# Altium PCB PCB3_fresa_v1.1A.PcbDoc
Units mil, origin at the board's own origin, x right, y up, seen from the top; angles counter-clockwise.
Board outline 7100 x 5100 mil, 2 copper layers (Top Layer, Bottom Layer); 89 components, 63 nets, 247 pads, 16 vias.
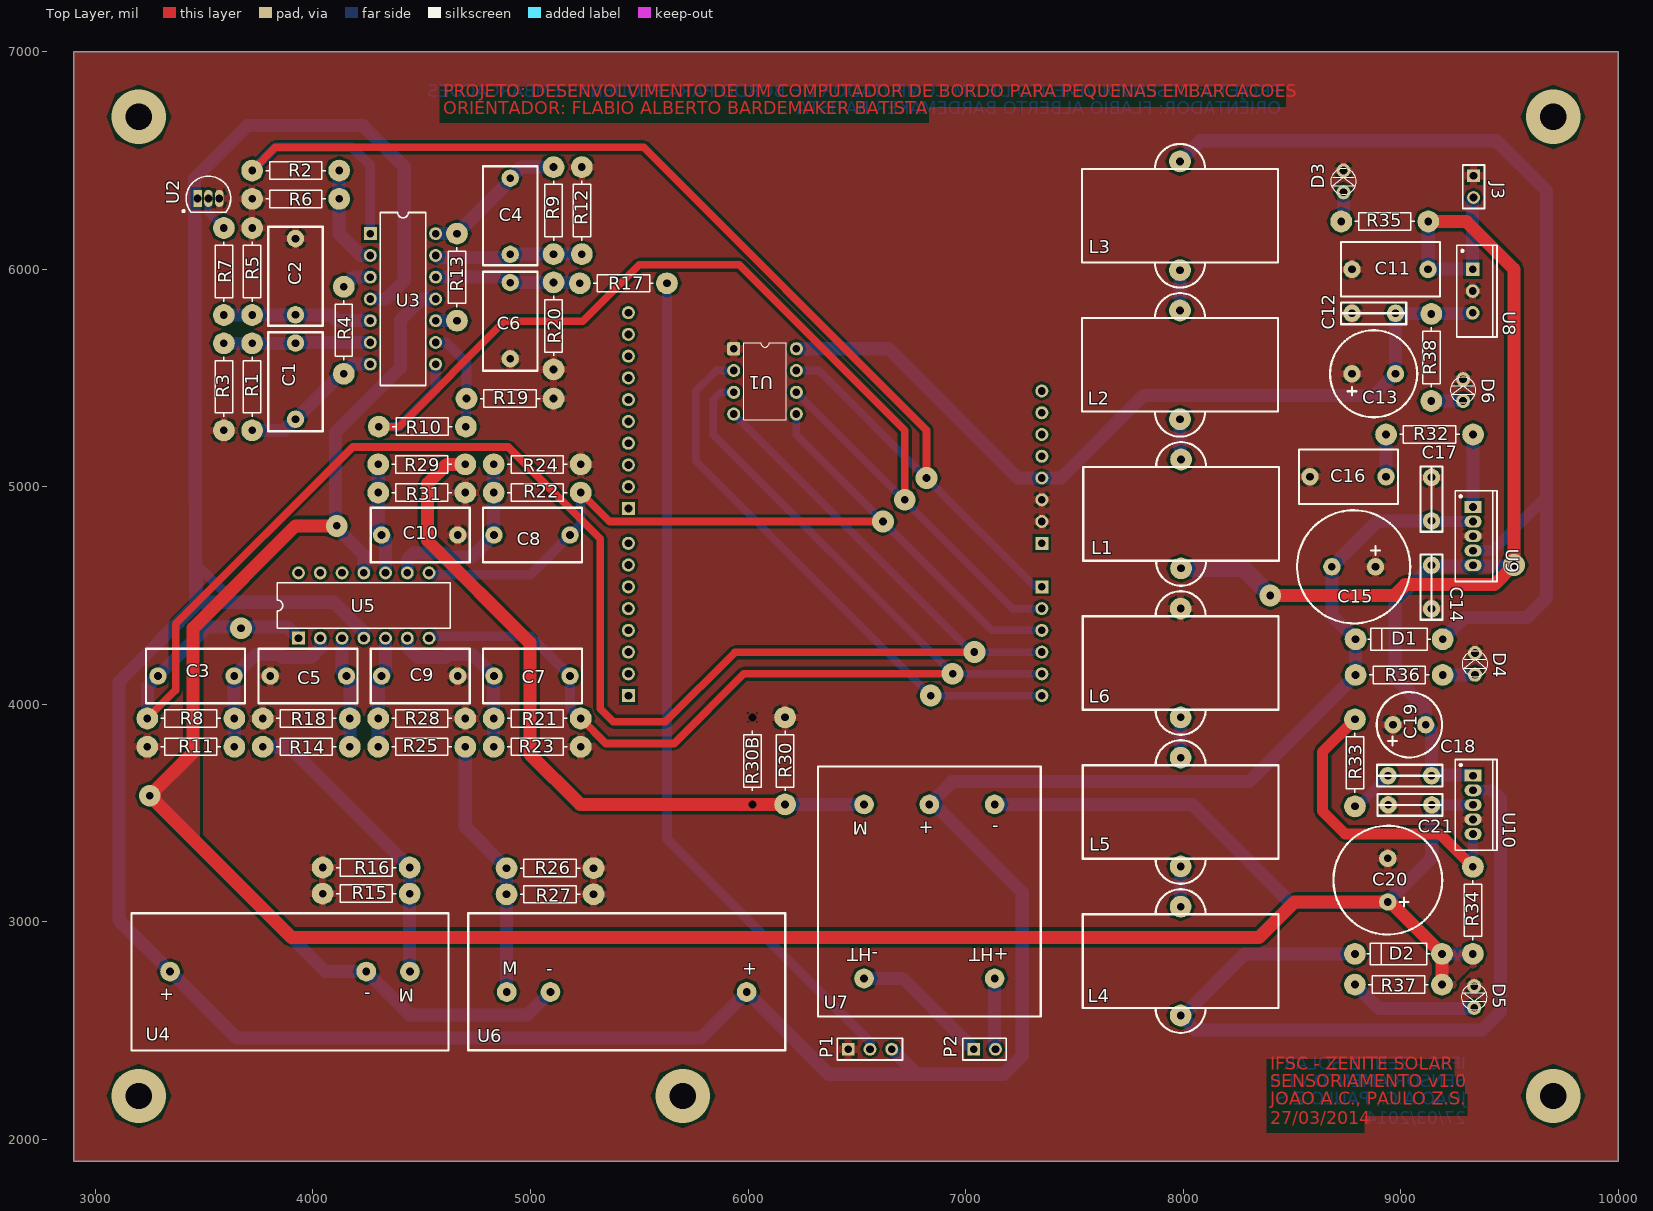
[diagram p0: Top Layer view]
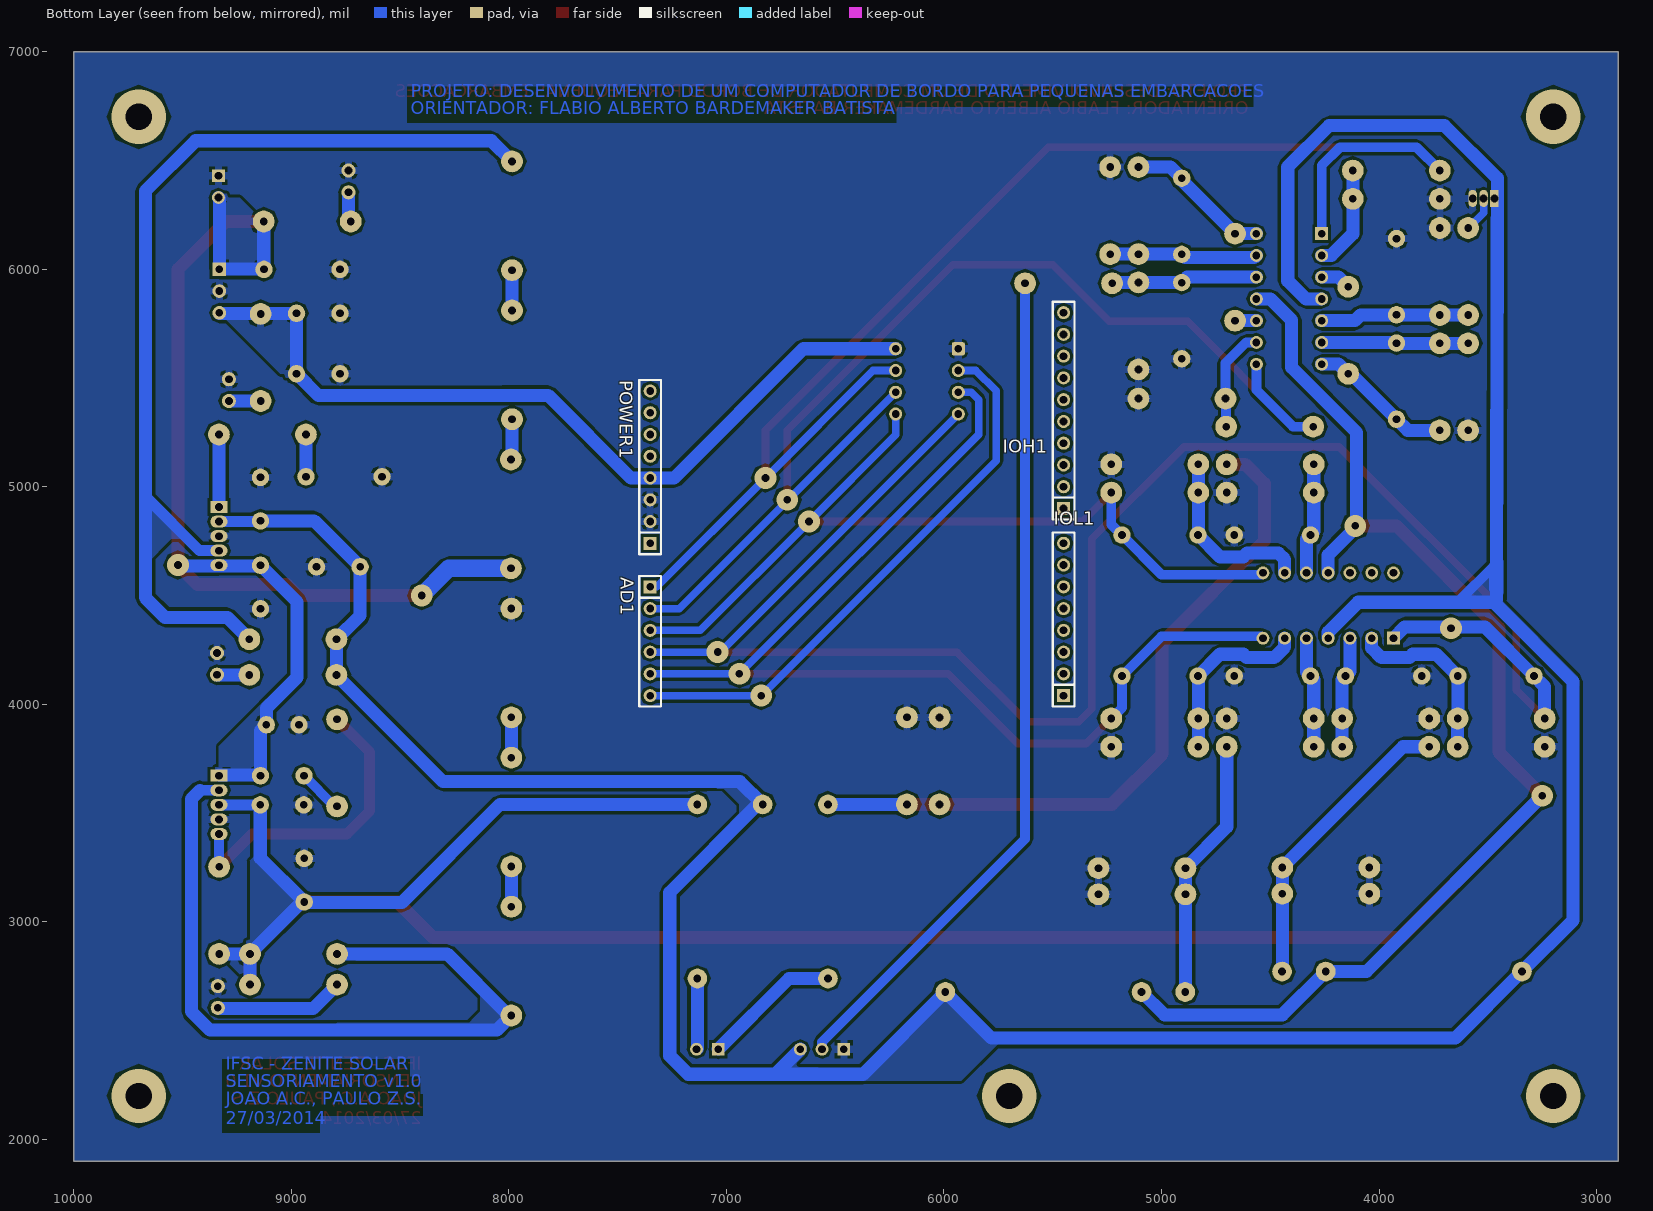
[diagram p1: Bottom Layer view, seen from below]

## Layer stack, top to bottom
Top Layer: signal copper 1.4
Dielectric: dielectric 12.6, FR-4, Dk 4.8
Bottom Layer: signal copper 1.4

## Board outline
2900,7000 10000,7000 10000,1900 2900,1900

## Design rules (kind name [scope] priority, off if disabled: settings)
Clearance [All] p1: gap=12
ComponentClearance [All] p1: gap=10 collisioncheckmode=3 verticalgap=30 showdistances=FALSE
HoleSize [All] p1: absolutevalues=TRUE maxlimit=250 minlimit=31.5 maxpercent=80.000 minpercent=20.000
HoleToHoleClearance [All] p1: gap=8 allowstackedmicrovias=TRUE
PlaneClearance [All] p1: clearance=30
PlaneConnect [All] p1: planeconnectstyle=Relief reliefexpansion=20 reliefentries=4 reliefconductorwidth=35 reliefairgap=8
PolygonConnect [All] p1: connectstyle=Relief reliefconductorwidth=35 reliefentries=4 polygonreliefangle="90 Angle"
RoomDefinition supplies [InComponentClass('supplies')] p1: confinementstyle=ConfineIn formatcopy=TRUE lockcomponents=FALSE outline 9456.93,2475 9456.93,6590 7519.93,6590 7519.93,2475
RoutingLayers [All] p1: top layer_v5=FALSE bottom layer_v5=TRUE
RoutingVias [All] p1: holewidth=35.43 width=60 viastyle="Through Hole" minholewidth=31.5 minwidth=60 maxholewidth=250 maxwidth=250
SilkscreenOverComponentPads [All] p1: minsilkscreentomaskgap=10
SolderMaskExpansion [All] p1: expansion=4
SupplyNets 3V3 [InNet('3V3')] p1: voltage=3.000
SupplyNets 5V_1 [InNet('5V')] p2: voltage=5.000
SupplyNets -15V_1 [InNet('-15V')] p3: voltage=-15.00
SupplyNets +15V_1 [InNet('+15V')] p4: voltage=15.00
SupplyNets +12V_1 [InNet('+12V')] p5: voltage=12.00
Width 5V [InNet('5V')] p1: maxlimit=60 minlimit=35 preferedwidth=45
Width -15V [InNet('-15V')] p2: maxlimit=80 minlimit=45 preferedwidth=60
Width +15V [InNet('+15V')] p3: maxlimit=80 minlimit=45 preferedwidth=60
Width +12V [InNet('+12V')] p4: maxlimit=100 minlimit=60 preferedwidth=80
Width [All] p5: maxlimit=60 minlimit=35 preferedwidth=45
21 further rules are at their usual default settings.

## Classes and differential pairs
component class arduinoshield: AD1 IOH1 IOL1 POWER1 U1
component class sensor: C1 C2 C3 C4 C5 C6 C7 C8 C9 C10 P1 P2 R1 R2 R3 R4 R5 R6 R7 R8 R9 R10 R11 R12 R13 R14 R15 R16 R17 R18 R19 R20 R21 R22 R23 R24 R25 R26 R27 R28 R29 R30 R30B R31 U2 U3 U4 U5 U6 U7
component class supplies: C11 C12 C13 C14 C15 C16 C17 C18 C19 C20 C21 D1 D2 D3 D4 D5 D6 J3 L1 L2 L3 L4 L5 L6 R32 R33 R34 R35 R36 R37 R38 U8 U9 U10

## Components (designator, comment, footprint, x,y, rotation, side; value= is the part's Value field where it differs from the comment)
AD1 "AD" "Header 6x1 8.5mm" 7350,4540 r270 bottom locked
C1 "approved sub OK" cap33n63v 3920,5660 r270 top locked
C2 "approved sub OK" cap33n63v 3920,5790 r90 top locked
C3 "approved sub OK" cap33n63v 3638,4130 r180 top locked
C4 "approved sub OK" cap33n63v 4907,6068 r90 top locked
C5 "approved sub OK" cap33n63v 4154.33,4130 r180 top locked
C6 "approved sub OK" cap33n63v 4907,5938 r270 top locked
C7 "approved sub OK" cap33n63v 4832,4130 r0 top locked
C8 "approved sub OK" cap33n63v 4832,4778 r0 top locked
C9 "approved sub OK" cap33n63v 4315.67,4130 r0 top locked
C10 "approved sub OK" cap33n63v 4315.67,4778 r0 top locked
C11 "approved sub OK" cap33n63v 8774.93,5999 r0 top locked
C12 "approved sub OK" cap100n 8774.93,5797 r0 top locked
C13 "approved sub OK" cap1000u25v 8774.93,5519 r0 top locked
C14 "approved sub OK" cap100n 9140.93,4439 r90 top locked
C15 "approved sub OK" cap2200u25v 8882.93,4632 r180 top locked
C16 "approved sub OK" cap33n63v 8581.93,5046 r0 top locked
C17 "approved sub OK" cap100n 9140.93,5043 r270 top locked
C18 "approved sub OK" cap100n 8940.93,3672 r0 top locked
C19 "approved sub OK" cap100u35v 8963.93,3906 r0 top locked
C20 "approved sub OK" cap470u50v 8939.93,3092 r90 top locked
C21 "approved sub OK" cap100n 9141.93,3538 r180 top locked
D1 "MUR160" DO-41 8991.93,4299 r90 top locked
D2 "MUR160" DO-41 8988.93,2853 r90 top locked
D3 "LED" LED-3MM-BLUE 8735.93,6353 r90 top locked
D4 "LED" LED-3MM-BLUE 9340.93,4136 r90 top locked
D5 "LED" LED-3MM-BLUE 9336.93,2705 r270 top locked
D6 "LED" LED-3MM-BLUE 9285.93,5394 r90 top locked
IOH1 "IOH" "Header 10x1 8.5mm" 5450,4900 r90 bottom locked
IOL1 "IOL" "Header 8x1 8.5mm" 5450,4040 r90 bottom locked
J3 "Header 2" HDR1X2 9333.93,6429 r270 top locked
L1 "INDC_180u_Toroid" Inductor 7989.93,4875 r180 top locked
L2 "INDC_180u_Toroid" Inductor 7984.93,5560 r180 top locked
L3 "INDC_180u_Toroid" Inductor 7984.93,6245 r180 top locked
L4 "INDC_180u_Toroid" Inductor 7987.93,2820 r180 top locked
L5 "INDC_180u_Toroid" Inductor 7987.93,3505 r180 top locked
L6 "INDC_180u_Toroid" Inductor 7987.93,4190 r180 top locked
P1 "Header 3" HDR1X3 6460,2415 r0 top locked
P2 "Header 2" HDR1X2 7037,2415 r0 top locked
POWER1 "POWER_UNO" "Header 8x1 8.5mm" 7350,4740 r90 bottom locked
R1 "Carbon Film" RESTH_AXIAL-0.4#1 3721,5459 r270 top locked
R2 "Carbon Film" RESTH_AXIAL-0.4#1 3921,6453 r0 top locked
R3 "Carbon Film" RESTH_AXIAL-0.4#1 3591,5459 r90 top locked
R4 "Carbon Film" RESTH_AXIAL-0.4#1 4142,5719 r270 top locked
R5 "Carbon Film" RESTH_AXIAL-0.4#1 3591,5989 r270 top locked
R6 "Carbon Film" RESTH_AXIAL-0.4#1 3921,6323 r180 top locked
R7 "Carbon Film" RESTH_AXIAL-0.4#1 3721,5989 r90 top locked
R8 "Carbon Film" RESTH_AXIAL-0.4#1 3439,3935 r180 top locked
R9 "Carbon Film" RESTH_AXIAL-0.4#1 5106,6269 r90 top locked
R10 "Carbon Film" RESTH_AXIAL-0.4#1 4503,5276 r0 top locked
R11 "Carbon Film" RESTH_AXIAL-0.4#1 3439,3805 r0 top locked
R12 "Carbon Film" RESTH_AXIAL-0.4#1 5236,6269 r270 top locked
R13 "Carbon Film" RESTH_AXIAL-0.4#1 4662,5963 r90 top locked
R14 "Carbon Film" RESTH_AXIAL-0.4#1 3969.67,3805 r0 top locked
R15 "Carbon Film" RESTH_AXIAL-0.4#1 4245,3130 r180 top locked
R16 "Carbon Film" RESTH_AXIAL-0.4#1 4245,3250 r180 top locked
R17 "Carbon Film" RESTH_AXIAL-0.4#1 5427,5935 r180 top locked
R18 "Carbon Film" RESTH_AXIAL-0.4#1 3969.67,3935 r180 top locked
R19 "Carbon Film" RESTH_AXIAL-0.4#1 4906,5405 r0 top locked
R20 "Carbon Film" RESTH_AXIAL-0.4#1 5106,5739 r270 top locked
R21 "Carbon Film" RESTH_AXIAL-0.4#1 5031,3935 r0 top locked
R22 "Carbon Film" RESTH_AXIAL-0.4#1 5031,4973 r0 top locked
R23 "Carbon Film" RESTH_AXIAL-0.4#1 5031,3805 r180 top locked
R24 "Carbon Film" RESTH_AXIAL-0.4#1 5031,5103 r180 top locked
R25 "Carbon Film" RESTH_AXIAL-0.4#1 4500.33,3805 r180 top locked
R26 "Carbon Film" RESTH_AXIAL-0.4#1 5090,3247 r0 top locked
R27 "Carbon Film" RESTH_AXIAL-0.4#1 5090,3127 r0 top locked
R28 "Carbon Film" RESTH_AXIAL-0.4#1 4500.33,3935 r0 top locked
R29 "Carbon Film" RESTH_AXIAL-0.4#1 4500.33,5103 r180 top locked
R30 "Carbon Film" RESTH_AXIAL-0.4#1 6170,3740 r90 top locked
R30B "Carbon Film" RESTH_AXIAL-0.4#2 6020,3740 r90 top
R31 "Carbon Film" RESTH_AXIAL-0.4#1 4500.33,4973 r0 top locked
R32 "Carbon Film" RESTH_AXIAL-0.4#1 9131.93,5240 r180 top locked
R33 "Carbon Film" RESTH_AXIAL-0.4#1 8788.93,3731 r90 top locked
R34 "Carbon Film" RESTH_AXIAL-0.4#1 9330.93,3053 r90 top locked
R35 "Carbon Film" RESTH_AXIAL-0.4#1 8925.93,6219 r0 top locked
R36 "Carbon Film" RESTH_AXIAL-0.4#1 8991.93,4135 r180 top locked
R37 "Carbon Film" RESTH_AXIAL-0.4#1 8988.93,2712 r0 top locked
R38 "Carbon Film" RESTH_AXIAL-0.4#1 9139.93,5594 r90 top locked
U1 "TL7726" DIP8-300 6078,5484 r0 top locked
U2 "LM35" Z03A 3520,6325 r270 top locked
U3 "LM324AJ" J014 4414,5863 r270 top locked
U4 "LA150-P" LA150-P 4446,2772 r180 top locked
U5 "LM324AJ" J014 4234,4454 r0 top locked
U6 "LA150-P" LA150-P 4891,2678 r0 top locked
U7 "LV20-P" LV20-P 7133,2740 r180 top locked
U8 "LM7805" T03B 9329.96,5899 r270 top locked
U9 "LM2577" T05A 9331.93,4773 r270 top locked
U10 "LM2575-15" T05A 9331.93,3538 r270 top locked

## Footprints (in the part's own frame and the unit in brackets; to place one, negate y for a bottom-side part, rotate by r counter-clockwise, add the part's x,y. Pads: shape width x height; smd on the part's side, far side on the other; paste and mask are expansions set on the pad)
cap33n63v [mil]
  round 80 hole 35.43: 1(0,0) 2(350,0)
  silkscreen extent -50,-125 405,125
cap100n [mil]
  round 80 hole 35.43: 1(0,0) 2(200,0)
  silkscreen extent -50,-50 250,50
cap100u35v [mil]
  round 80 hole 35.43: 1(0,0) 2(150,0)
  silkscreen extent -75,-150 225,150
cap470u50v [mil]
  round 80 hole 35.43: 1(0,0) 2(200,0)
  silkscreen extent -150,-250 350,250
cap1000u25v [mil]
  round 80 hole 35.43: 1(0,0) 2(200,0)
  silkscreen extent -100,-200 300,200
cap2200u25v [mil]
  round 80 hole 35.43: 1(0,0) 2(200,0)
  silkscreen extent -160,-260 360,260
DIP8-300 [mil] "DIP, 8-Leads, 0.300\" lead span , 0.100\" lead pitch, IPC Density A"
  round 39.37 on Mech14: 0(0,0)
  rrect25% 60x60 hole 35.43: 1(-144,150)
  round 60 hole 35.43: 2(-144,50) 3(-144,-50) 4(-144,-150) 5(144,-150) 6(144,-50) 7(144,50) 8(144,150)
  silkscreen extent -98,-177 98,177, body extent -98,-177 98,177, height 210
DO-41 [mm] "Diode, thru-hole"
  round 2.54 hole 0.9: A(0,-5.08) K(0,5.08)
  silkscreen extent -1.27,-3.68 1.27,3.68
HDR1X2 [mm] "Connector; Header; 2 Position"
  rect 1.5x1.5 hole 0.9: 1(0,0)
  round 1.5 hole 0.9: 2(2.54,0)
  silkscreen extent -1.27,-1.27 3.81,1.27
HDR1X3 [mm] "Connector; Header; 3 Position"
  rect 1.5x1.5 hole 0.9: 1(0,0)
  round 1.5 hole 0.9: 2(2.54,0) 3(5.08,0)
  silkscreen extent -1.27,-1.27 6.35,1.27
"Header 6x1 8.5mm" [mil] "Stackable 6 pin header"
  rect 60x60 hole 35.43: 1(0,0)
  round 60 hole 35.43: 2(100,0) 3(200,0) 4(300,0) 5(400,0) 6(500,0)
  silkscreen extent -50,-50 550,50
"Header 8x1 8.5mm" [mil] "Stackable 8 pin header"
  rect 60x60 hole 35.43: 1(0,0)
  round 60 hole 35.43: 2(100,0) 3(200,0) 4(300,0) 5(400,0) 6(500,0) 7(600,0) 8(700,0)
  silkscreen extent -50,-50 750,50
"Header 10x1 8.5mm" [mil] "Stackable 10 pin header"
  rect 60x60 hole 35.43: 1(0,0)
  round 60 hole 35.43: 2(100,0) 3(200,0) 4(300,0) 5(400,0) 6(500,0) 7(600,0) 8(700,0) 9(800,0) 10(900,0)
  silkscreen extent -50,-50 950,50
Inductor [mm] "Toroidal Inductor"
  round 2.54 hole 0.9: 1(0,6.35) 2(0,-6.35)
  silkscreen extent -11.43,-8.38 11.43,8.38
J014 [mm] "DIP; 14 Leads; Row Spacing 7.62 mm; Pitch 2.54 mm"
  rect 1.5x1.5 hole 0.9: 1(-7.62,-3.81)
  round 1.5 hole 0.9: 2(-5.08,-3.81) 3(-2.54,-3.81) 4(0,-3.81) 5(2.54,-3.81) 6(5.08,-3.81) 7(7.62,-3.81) 8(7.62,3.81) 9(5.08,3.81) 10(2.54,3.81) 11(0,3.81) 12(-2.54,3.81) 13(-5.08,3.81) 14(-7.62,3.81)
  silkscreen extent -10.1,-2.65 10.1,2.65
LA150-P [mm] "Current Transducer"
  round 2.3 hole 0.9: 1(0,0) 2(5.1,0) 3(28,0)
  silkscreen extent -4.5,-6.8 32.5,9.2
LED-3MM-BLUE [mil]
  round 65 hole 35.43: A(0,0) K(100,0)
  silkscreen extent -9,-59 109,59, body extent -15,-63 114,67, height 250
LV20-P [mm] "Voltage Transducer LV 20-P"
  round 2.3 hole 0.9: 1(0,-20.32) 2(7.62,-20.32) 3(15.24,-20.32) 4(0,0) 5(15.24,0)
  silkscreen extent -5.38,-24.76 20.62,4.44
RESTH_AXIAL-0.4#1 [mm]
  round 2.54 hole 0.9: 1(-5.08,0) 2(5.08,0)
  silkscreen extent -3.5,-1.02 3.5,1.02
RESTH_AXIAL-0.4#2 [mm]
  round 0 / inner round 0 / far side round 2.54 hole 0.914: 1(-5.08,0) 2(5.08,0)
  silkscreen extent -3.5,-1.02 3.5,1.02, body extent -5.38,-1.28 5.38,1.28, height 2.6
T03B [mm] "TO, Thru-Hole, Vertical, Heatsink Mounted; 3 In-Line Leads; Pitch 2.54 mm"
  rect 1.6x1.6 hole 0.9: 1(-2.54,0)
  round 1.6 hole 0.9: 2(0,0) 3(2.54,0)
  silkscreen extent -5.35,-1.85 5.35,2.85, body extent -5.35,-1.85 5.35,2.85, height 19.4
T05A [mm] "TO, Thru-Hole, Vertical, Heatsink Mounted; 5 In-Line Leads; Pitch 1.70 mm"
  rect 1.4x2 hole 0.9: 1(-3.4,0)
  oval 1.4x2 hole 0.9: 2(-1.7,0) 3(0,0) 4(1.7,0) 5(3.4,0)
  silkscreen extent -5.3,-2.1 5.3,2.8, body extent -5.3,-2.1 5.3,2.8, height 15.9
Z03A [mm] "TO, Flat Index; 3 In-Line, Axial Leads; Body Dia. 5mm; Leads 0.55 x 0.50 mm (max)"
  rect 2x1 hole 0.9: 1(0,-1.27)
  oval 2x1 hole 0.9: 2(0,0) 3(0,1.27)
  silkscreen extent -2.6,-3.02 1.6,2.6, body extent -2.61,-2.61 1.6,2.61, height 5.2

## Part data
C1 C2 C3 C4 C5 C6 C7 C8 C9 C10 C11 C12 C13 C14 C15 C16 C17 C18 C19 C20 C21: library part CAPC_330n_0805, "Capacitor SMD Cer 330nF 10% 25V X7R 0805"
D1 D2: library part DIODE_1N4007_1000V_1.0A_DO-41, "Diode 1N4007 1A 1000V THD"
D3 D4 D5 D6: library part LED-BLUE-3MM, "LED-BLUE-3MM"
J3 P2: "Header, 2-Pin"
L1 L2 L3 L4 L5 L6: "Power Inductor 180µH 10% SMD Toroid"
P1: "Header, 3-Pin"
R1 R2 R3 R4 R5 R6 R7 R8 R9 R10 R11 R12 R13 R14 R15 R16 R17 R18 R19 R20 R21 R22 R23 R24 R25 R26 R27 R28 R29 R30 R30B R31 R32 R33 R34 R35 R36 R37 R38: library part RES_1K_Axial_0.25W_5%, "Resistor THD Axial 1k Ohm 0.25W 5% Carbon Film"
U1: "Hex Clamping Circuit - Overvoltage Limiter"
U2: library part LM35CAZ, "Precision Centigrade Temperature Sensor, 3-pin TO-92"
U3 U5: "Quadruple Operational Amplifier"
U4 U6: "Current Transducer"
U7: "Voltage Transducer"
U8: library part LM78M05CT, "3-Terminal Positive Voltage Regulators, 3-pin TO-220"
U9: "Boost"
U10: library part LM2575, "Buck"

## Via types
v1: diameter 100, hole 35.43, Top Layer to Bottom Layer, 11 vias
v2: diameter 250, hole 120, Top Layer to Bottom Layer, 5 vias

## Nets (pads, with @x,y where several pads share a name; then routed paths per layer and width w, separated by ;. In a path a pad name is that pad's centre, name@x,y a point inside that pad or via, vN(x,y) a via of type N, cw(c..) or ccw(c..) an arc to the next point about the centre after c; other vN are vias at no path point)
3V3: POWER1.5
5V: C12.2 C13.2 POWER1.4 R38.2 U1.8 U8.3 | length 3829.2
  Bottom Layer w60: U1.8 6646,5634 7240,5040 POWER1.4 7439,5040 7819,5420 8030.49,5420 8031.49,5419 8874.93,5419 C13.2 C12.2 U8.3@9327.96,5797
+12V: C11.2 C14.2 C18.2 C19.2 J3.2 L1.1 R35.2 U8.1 U9.5 U10.1 | length 5917.3
  Top Layer w60: v1(8400,4500) 8970,4500 9020,4550 9430,4550 v1(9520,4640) 9520,6000 9301,6219 R35.2 ; C14.2 C14.2@9141.07,4639.14
  Bottom Layer w60: R35.2 9125.93,6000 9328.96,6000 U8.1 9329.96,6325.03 J3.2 ; C18.2 C18.2@9140.93,3675 ; C14.2@9140.93,4636 U9.5@9331.93,4636 ; C14.2 8972,4470.07 8972,4124 9113.93,3982.07 C19.2 9140.93,3879 C18.2@9140.93,3675 ; U10.1@9331.93,3675 C18.2@9140.93,3675 ; U9.5@9331.93,4636.14 v1@9519.14,4636.14 ; v1@9519.14,4639.14 v1(9520,4640)
  Bottom Layer w80: L1.1 8275,4625 v1(8400,4500)
+15V: C15.2 C17.2 D1.K P1.3 R36.2 U2.1 U3.4 U4.3 U5.4 U6.3 U7.2 U9.2 | length 16245.4
  Bottom Layer w45: 3469,4639 3470,4638 3639,4469
  Bottom Layer w50: 3470,4530 3470,4638 ; C17.2@9144.93,4839.93 U9.2
  Bottom Layer w60: 3456.5,6234.44 3456.5,6419.5 ; 3457,6233.94 3460,4480 ; 3459.5,6419.5 3700,6660 4230,6660 4420,6470 4420,5946 4337,5863 U3.4 ; U5.4 4234,4331.28 4096.28,4469 3639,4469 3474,4469 3110,4105 3110,3005.64 U4.3 3649.64,2466 5781.36,2466 U6.3 6371.36,2300 6775,2300 ; P1.3 6775,2300 ; C17.2@9144.93,4839 C17.2 8893.93,4843 C15.2 8682.93,4408 D1.K R36.2 8301.93,3645 7176.88,3645 7176.61,3645.28 7089.39,3645.28 7089.12,3645 6938,3645 U7.2 6855,3540 7260,3135 7260,2385 7175,2300 6775,2300
-15V: C20.1 C21.1 D2.A R34.1 R37.2 U3.11 U4.2 U5.11 U6.2 U7.1 U10.3 | length 15421.4
  Top Layer w60: v1(3250,3580) 3901,2929 8349,2929 8512,3092 C20.1 8949.93,3092 D2.A R37.2 ; v1@3251,3581 3450,3780 3450,4350 3920,4820 v1(4110,4820) ; U7.1@7133,3530 U7.1
  Bottom Layer w50: C21.1 U10.3
  Bottom Layer w60: v1(3250,3580) 4058,2772 U4.2 4444.49,2572.72 4986.51,2572.72 U6.2 ; U5.11 4234,4686 4103,4817 4103,5249 4402,5548 4402,5765 4500,5863 U3.11 ; U7.1 8040,3540 8490,3090 8937.93,3090 C20.1 ; C21.1 9141.93,3294 C20.1 ; R37.2 D2.A ; R34.1 D2.A ; C20.1 8949.93,3092 D2.A
AD0: AD1.1 R2.1 U1.7 U3.1 | length 6376.6
  Top Layer w35: R2.1 3828,6560 5520,6560 6820,5260 v1(6820,5040)
  Bottom Layer w35: U1.7 6326,5534 v1(6820,5040) 7320,4540 AD1.1
  Bottom Layer w45: R2.1 3828,6560 4180,6560 4264,6476 U3.1
AD1: AD1.2 R10.1 U1.6 U3.8 | length 5349.3
  Top Layer w35: R10.1 4396,5276 4880,5760 5240,5760 5500,6020 5960,6020 6720,5260 v1(6720,4940)
  Bottom Layer w35: U1.6 7216,4440 AD1.2
  Bottom Layer w45: R10.1 4396,5276 4564,5444 U3.8
AD2: AD1.3 C8.2 R22.2 U1.5 U5.8 | length 3998.5
  Top Layer w35: R22.2@5247,4973 R22.2 5364,4840 v1(6620,4840)
  Bottom Layer w35: U1.5 6222,5238 v1(6620,4840) 7120,4340 AD1.3
  Bottom Layer w45: U5.8 4542.5,4595.5 4999.5,4595.5 C8.2 5231,4827 R22.2
AD3: AD1.4 C3.2 R8.2 U1.4 U5.1 | length 8453.6
  Top Layer w35: R8.2 3370,4066 3370,4370 4182.5,5182.5 4897.5,5182.5 5320,4760 5320,3980 5380,3920 5620,3920 5940,4240 v1(7040,4240)
  Bottom Layer w35: U1.4 7028,4240 v1(7040,4240) AD1.4
  Bottom Layer w60: R8.2 3239,4081 C3.2 3514,4356 3882.47,4356 U5.1@3934,4304.47
  other v1: 3670,4350
AD4: AD1.5 C7.2 R21.2 U1.3 U5.7 | length 5065.3
  Top Layer w35: R21.2 5346,3820 5660,3820 5980,4140 v1(6940,4140)
  Bottom Layer w35: U1.3 5874,5434 5840,5400 5840,5240 v1(6940,4140) AD1.5
  Bottom Layer w45: U5.7 4542.5,4312.5 4999.5,4312.5 C7.2 5182,3984 R21.2
AD5: AD1.6 U1.2 | length 2570.3
  Bottom Layer w35: U1.2 5854,5534 5760,5440 5760,5120 v1(6840,4040) AD1.6
GND: C2.2 C5.2 C6.2 C9.2 C10.2 C11.1 C12.1 C13.1 C14.1 C15.1 C16.1 C17.1 C19.1 C20.2 C21.2 D3.K D4.K D5.A D6.K J3.1 L6.2 P1.1 POWER1.2 POWER1.3 R3.1 R6.2 R7.2 R11.1 R12.1 R15.2 R16.2 R18.2 R19.2 R20.2 R23.1 R24.1 R26.2 R27.2 R28.2 R30.2 R30B.2 R31.2 U1.1 U2.3 U8.2 U9.3 U10.4
IO0: IOL1.1
IO1: IOL1.2
IO2: IOL1.3
IO3: IOL1.4
IO4: IOL1.5
IO5: IOL1.6
IO6: IOL1.7
IO7: IOL1.8
IOREF: POWER1.7
MISO: 
MOSI: 
NetC1_1: C1.1 R1.1 R3.2 U3.6 | length 674.7
  Bottom Layer w60: R3.2 R1.1 3919,5659 C1.1 3923,5663 U3.6
NetC1_2: C1.2 R1.2 R4.2 U3.7 | length 668.9
  Bottom Layer w60: R1.2 3869,5259 C1.2 4129,5519 R4.2 4186,5563 U3.7
NetC2_1: C2.1 R5.2 R7.1 U3.5 | length 684.6
  Bottom Layer w60: R5.2 R7.1 3919,5789 C2.1 4085,5790 4112,5763 U3.5
NetC3_1: C3.1 R8.1 R11.2 U5.2 | length 832.7
  Bottom Layer w60: R11.2 R8.1 3638,3936 C3.1 3738,4230 3845.75,4230 3861.28,4214.47 3989.47,4214.47 4034,4259 U5.2
NetC4_1: C4.1 R9.1 R12.2 U3.13 | length 682.8
  Bottom Layer w60: U3.13 4574,6053 4892,6053 C4.1 4908,6069 R9.1 R12.2
NetC4_2: C4.2 R9.2 R13.2 U3.14 | length 674.6
  Bottom Layer w60: U3.14 R13.2 4907,6408 C4.2 4958,6469 R9.2
NetC5_1: C5.1 R14.2 R18.1 U5.3 | length 513.8
  Bottom Layer w60: U5.3 4134,4150.33 C5.1 4169.67,4114.67 R18.1 R14.2
NetC6_1: C6.1 R17.2 R20.1 U3.12 | length 682.8
  Bottom Layer w60: U3.12 4882,5963 C6.1 5105,5938 R20.1 R17.2@5236,5939
NetC7_1: C7.1 R21.1 R23.2 U5.6 | length 832.4
  Bottom Layer w60: U5.6 4434,4263 4482.53,4214.47 4608.72,4214.47 4624.25,4230 4732,4230 C7.1 4831,4129 R21.1 R23.2
NetC8_1: C8.1 R22.1 R24.2 U5.9 | length 845.6
  Bottom Layer w60: U5.9 4434,4666 4462.62,4694.62 4607.62,4694.62 4624.25,4678 4732,4678 C8.1 4831,4779 R22.1 R24.2
NetC9_1: C9.1 R25.2 R28.1 U5.5 | length 512.9
  Bottom Layer w60: R25.2 R28.1 4300.33,4114.67 C9.1 4334,4148.33 U5.5
NetC10_1: C10.1 R29.2 R31.1 U5.10 | length 512.9
  Bottom Layer w60: R29.2 R31.1 4300.33,4793.33 C10.1 4334,4759.67 U5.10
NetC16_2: C16.2 R32.2 | length 194
  Bottom Layer w60: C16.2 R32.2
NetC18_1: C18.1 R33.1 | length 210.4
  Bottom Layer w45: R33.1 8799.93,3531 C18.1
NetD1_A: D1.A L3.2 U9.4 | length 4687.5
  Bottom Layer w50: U9.4 9421.07,4706.07 9670,4955
  Bottom Layer w60: L3.2 8079.93,6590 9439,6590 9670,6359 9670,4955 9670,4490 9580,4400 9292.93,4400 D1.A
NetD2_K: D2.K L4.1 U10.2 | length 3571.4
  Bottom Layer w50: U10.2 9418.93,3604.93
  Bottom Layer w60: D2.K 8283,2853 8000,2570 L4.1 8054.93,2503 9373,2503 9458,2588 9458,3565.86 9418.93,3604.93
NetD3_A: D3.A R35.1 | length 138.1
  Bottom Layer w60: R35.1 8735.93,6229 D3.A
NetD4_A: D4.A R36.1 | length 149.4
  Bottom Layer w60: R36.1 9339.93,4135 D4.A
NetD5_K: D5.K R37.1 | length 594.8
  Bottom Layer w60: R37.1 8898.93,2602 9333.93,2602 D5.K
NetD6_A: D6.A R38.1 | length 146
  Bottom Layer w60: R38.1 D6.A
NetL1_2: L1.2 L2.1 | length 180
  Bottom Layer w60: L1.2@7984.93,5130 L2.1
NetL2_2: L2.2 L3.1 | length 185
  Bottom Layer w60: L2.2 L3.1
NetL4_2: L4.2 L5.1 | length 185
  Bottom Layer w60: L4.2 L5.1
NetL5_2: L5.2 L6.1 | length 185
  Bottom Layer w60: L5.2 L6.1
NetP1_2: P1.2 R17.1 | length 3906.5
  Bottom Layer w45: R17.1 5627,3381.3 6560,2448.3 P1.2
NetP2_1: P2.1 U7.5 | length 638.6
  Bottom Layer w60: U7.5 6712,2740 P2.1
NetP2_2: P2.2 U7.4 | length 321
  Bottom Layer w60: P2.2@7133,2419 U7.4
NetR2_2: R2.2 R6.1 U3.2 | length 475
  Bottom Layer w60: R2.2 R6.1 4121,6162.09 4220.09,6063 U3.2
NetR4_1: R4.1 U3.3 | length 140.2
  Bottom Layer w60: R4.1 4186,5963 U3.3
NetR5_1: R5.1 U2.2 | length 165.4
  Bottom Layer w35: U2.2 3520,6260 R5.1
NetR10_2: R10.2 R19.1 U3.9 | length 474.6
  Bottom Layer w45: U3.9 4611,5663 4706,5568 R19.1 4703,5402 R10.2
NetR13_1: R13.1 U3.10 | length 98
  Bottom Layer w60: U3.10 R13.1
NetR14_1: R14.1 R15.1 R16.1 U4.1 | length 1382.2
  Bottom Layer w60: R14.1 3890,3805 R16.1 R15.1 U4.1@4445,2773
NetR25_1: R25.1 R26.1 R27.1 U6.1 | length 1206
  Bottom Layer w60: R25.1 4700.33,3436.67 R26.1 R27.1 4890,2679 U6.1
NetR29_1: R29.1 R30.1 R30B.1 U7.3 | length 3279.6
  Top Layer w60: R29.1 4616,5103 4527,5014 4527,4753 4997,4283 4997,3771 5228,3540 R30B.1 R30.1
  Bottom Layer w60: R30.1 U7.3
NetR32_1: R32.1 U9.1 | length 323
  Bottom Layer w60: U9.1@9331.93,4917 R32.1
NetR33_2: R33.2 R34.2 U10.5 | length 1433.6
  Top Layer w50: R33.2 8639,3781.07 8639,3509 8744,3404 9179.93,3404 R34.2
  Bottom Layer w45: R34.2 9330.93,3403.14 U10.5
RESET: POWER1.6
SCK: 
VIN: POWER1.1
pads on no net: IOH1.1 IOH1.2 IOH1.3 IOH1.4 IOH1.5 IOH1.6 IOH1.7 IOH1.8 IOH1.9 IOH1.10 POWER1.8 U1.0 U5.12 U5.13 U5.14
copper on no net:
  other v2: 3200,2200 5700,2200 9700,2200 3200,6700 9700,6700

## Polygon pours and split planes (outlines as drawn)
-15V on Top Layer "Top Layer--15V" (solid, remove dead copper, pour order 23): 9190,2660 9380,2850 9191.93,2850 9188.93,2853
-15V on Top Layer "Bottom Layer-+12V" (solid, remove dead copper, pour order 61): 3480,3810 3480,3350 3250,3580
GND on Top Layer "Top Layer-GND" (solid, remove dead copper, pour order 71): 10000,7000 2900,7000 2900,1900 10000,1900
+15V on Bottom Layer "Bottom Layer-+15V 6" (solid, pour order 59): 3460,4692 3080,4312 3080,4086 3127,4086 3487,4446 3488,4447 3652,4447 3652,4456 3469,4639
+15V on Bottom Layer "Bottom Layer-+15V 5" (solid, pour order 48): 6661,2414 6551,2304 6551,2301 6754,2301 6766,2313
NetD2_K on Bottom Layer "Bottom Layer-NetD2_K 2" (solid, pour order 62): 8007.92,2570.05 8009.95,2570.05 8080,2500 8800,2500 8800,2523 8660,2663 8660,2780 8740,2860 8733,2853 8290.93,2853
NetD2_K on Bottom Layer "Bottom Layer-NetD2_K 1" (solid, pour order 61): 8788.93,2853 8695,2853 8650,2808 8650,2720 8650,2660 8805,2505 8803,2503 8054.93,2503 7987.93,2570 8270.93,2853
+15V on Bottom Layer "Bottom Layer-+15V 3" (solid, pour order 50): 6838,3545 6938,3645 7065,3645 6910,3490 6910,3470
+15V on Bottom Layer "Bottom Layer-+15V 2" (solid, pour order 49): 6840,3540 6980,3400 6980,3550 7070,3640
NetD1_A on Bottom Layer "Bottom Layer-NetD1_A" (solid, remove dead copper, pour order 27): 9670,4950 9480,4760 9550,4760 9670,4640
+12V on Bottom Layer "Bottom Layer-+12V" (solid, remove dead copper, pour order 43): 9333.93,6329 9235.93,6329 9125.93,6219 9125.93,6000 9328.96,6000
5V on Bottom Layer "Bottom Layer-+12V" (solid, remove dead copper, pour order 45): 8974.93,5519 9049.96,5519 9329.96,5799 9327.96,5797 8974.93,5797
+12V on Bottom Layer "Bottom Layer-+12V" (solid, remove dead copper, pour order 47): 9331.93,3675 9331.93,3808.07 9110,4030 9113.93,4026.07 9113.93,3910 9113.93,3897 9140.93,3870 9140.93,3675
-15V on Bottom Layer "Bottom Layer-+12V" (solid, remove dead copper, pour order 49): 9188.93,2853 9178.93,2853 8939.93,3092 9141.93,3294 9141.93,3310 9160,3310 9190,3280 9188.93,3278.93 9188.93,2853
-15V on Bottom Layer "Bottom Layer-+12V" (solid, remove dead copper, pour order 51): 9330.93,2853 9329.93,2853 9188.93,2712 9188.93,2853
+15V on Bottom Layer "Bottom Layer-+12V" (solid, remove dead copper, pour order 55): 7030,3645 6938,3645 6930,3637 6833,3540 6855,3540 6940,3455 6940,3540 7040,3640
+15V on Bottom Layer "Bottom Layer-+12V" (solid, remove dead copper, pour order 59): 5993.36,2678 5988,2678 5750,2440 5920,2270 6380,2270
NetD2_K on Bottom Layer "Top Layer-NetD2_K" (solid, remove dead copper, pour order 67): 7987.92,2555.32 8130,2697.4 8130,2700 8130,2590 8210,2510 8203,2503 8054.93,2503
GND on Bottom Layer "Bottom Layer-GND" (solid, remove dead copper, pour order 69): 10000,7000 2900,7000 2900,1900 10000,1900

## Other copper
Top Layer:
  text "PROJETO: DESENVOLVIMENTO DE UM COMPUTADOR DE BORDO PARA PEQUENAS EMBARCACOES" at 4600,6770 h100
  text "ORIENTADOR: FLABIO ALBERTO BARDEMAKER BATISTA" at 4600,6690 h100
  text "IFSC - ZENITE SOLAR" at 8400,2301 h100
  text "SENSORIAMENTO v1.0" at 8400,2220 h100
  text "JOAO A.C., PAULO Z.S." at 8400,2140 h100
  text "27/03/2014" at 8400,2050 h100
Bottom Layer:
  text "PROJETO: DESENVOLVIMENTO DE UM COMPUTADOR DE BORDO PARA PEQUENAS EMBARCACOES" at 8450,6770 h100
  text "ORIENTADOR: FLABIO ALBERTO BARDEMAKER BATISTA" at 8450,6690 h100
  text "IFSC - ZENITE SOLAR" at 9300,2301 h100
  text "SENSORIAMENTO v1.0" at 9300,2220 h100
  text "JOAO A.C., PAULO Z.S." at 9300,2140 h100
  text "27/03/2014" at 9300,2050 h100

## Silkscreen, mask and mechanical layers (free items; w line width, h text height)
Mechanical 15:
  the board outline again, w10

## Text inside footprints (layer, text, board x,y; h text height)
U4: Top Overlay "M" at 4466,2692 h60 r180; Top Overlay "-" at 4265.21,2692 h60 r180; Top Overlay "+" at 3363.64,2692 h60 r180
U6: Top Overlay "M" at 4871,2758 h60; Top Overlay "-" at 5071.79,2758 h60; Top Overlay "+" at 5973.36,2758 h60
U7: Top Overlay "-HT" at 6598,2880 h60 r180; Top Overlay "+HT" at 7198,2880 h60 r180; Top Overlay "M" at 6553,3460 h60 r180; Top Overlay "+" at 6853,3460 h60 r180; Top Overlay "-" at 7153,3460 h60 r180